# Allegro board Mures_Georgiana.brd
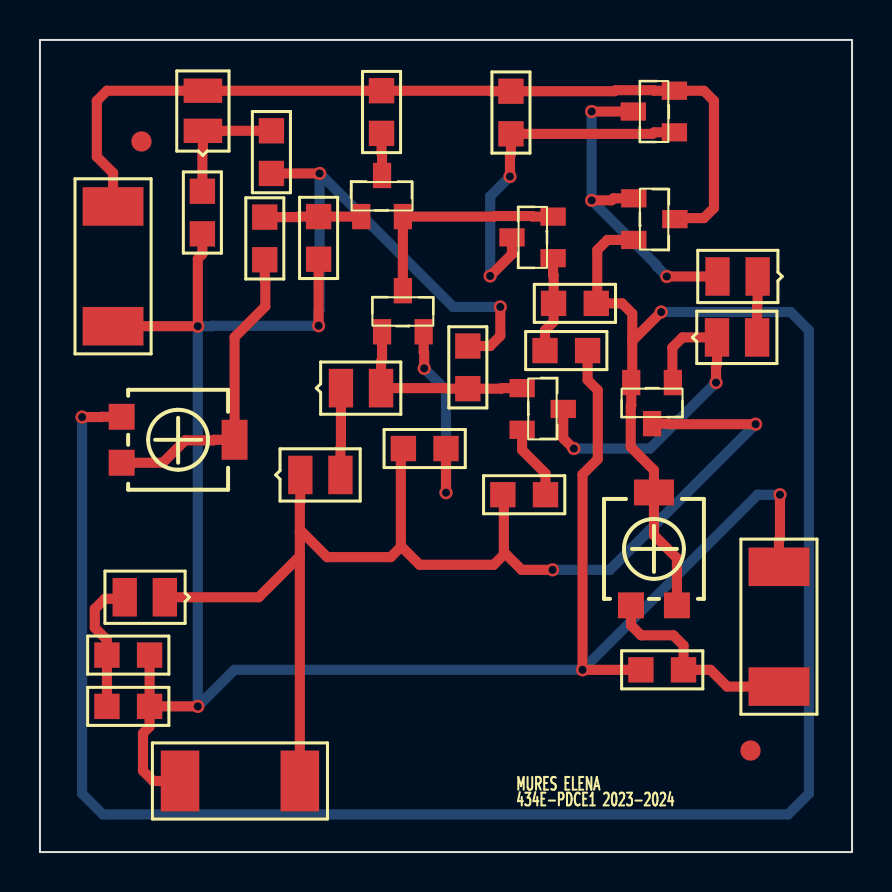
[diagram p0: board, top side]
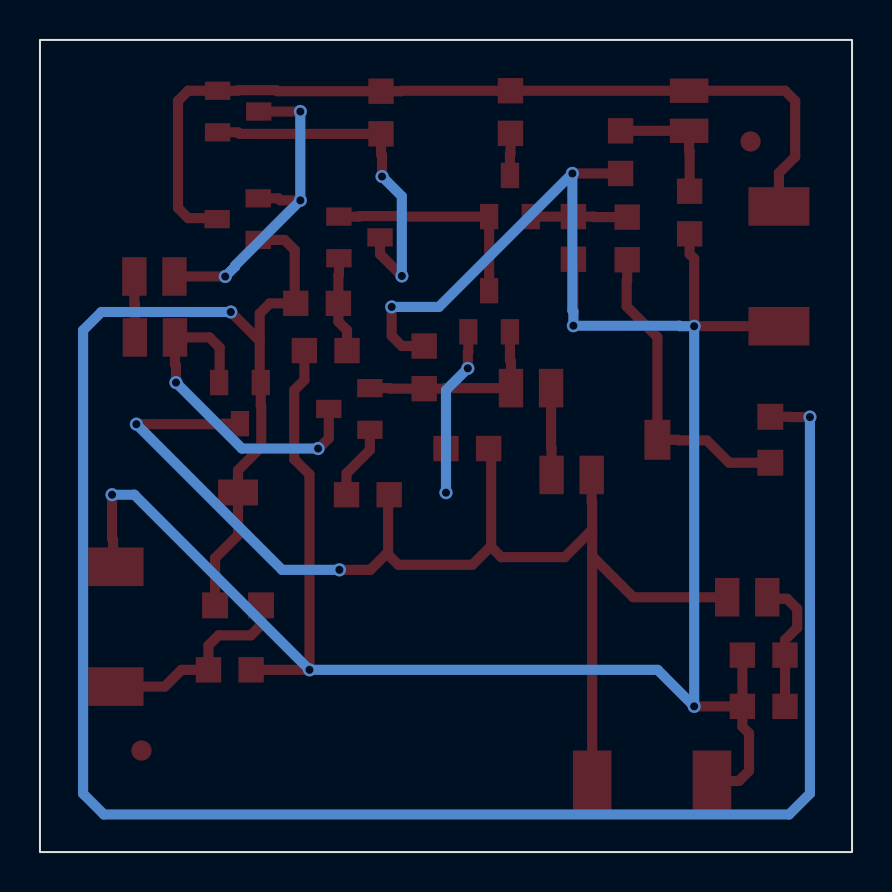
[diagram p1: board, bottom side, seen from below]

Outline 40.64 x 40.64 mm; copper layers: TOP, BOTTOM. Coordinates in mm from the lower left corner of the outline.
Outline path: rectangle 0,0 40.64,40.64

## Design rules (mm)
nets with their own width: min track width 0.406; nets N52612 N52626 N52640 N52746 N52752 N52812 N52842 N52912 N52990 N53016 N53140 N53266 N53280 N53508 N53516 N53588 N530321
nets with their own width: min track width 0.508; nets GND VCC VEE

## Placement (name value [footprint] x y rotation side)
C1  22n  [SMC0805]  13.94 29.67 90 top
D3  LED  [SMD0805]  8.15 36.09 90 top
D4  LED  [SMD0805]  6.25 12.75 180 top
J1  CON2  [SMR2512]  3.66 26.31 90 top
J2  CON2  [SMR2512]  13 3.56 180 top
J3  CON2  [SMR2512]  36.98 8.28 90 top
NOREF  -  [unnamed]  5.08 35.56 0 top
NOREF#2  -  [#2]  0 40.64 0 top
NOREF#3  -  [#2]  0 0 90 top
NOREF#4  -  [unnamed]  35.56 5.08 0 top
P2  10k  [TS53YL]  4.09 19.48 180 top
P10  500k  [TS53YL]  31.88 12.34 270 top
Q1  QBC846B  [TO236AB]  25.68 29.72 0 top
Q2  QBC846B  [TO236AB]  16.08 31.8 270 top
Q3  QBC846B  [TO236AB]  17.12 26.04 270 top
Q4  QBC846B  [TO236AB]  24.13 23.22 180 top
Q5  QBC846B  [TO236AB]  29.72 32.72 180 top
Q6  QBC856B  [TO236AB]  31.75 36.02 0 top
Q7  QBC856B  [TO236AB]  31.67 23.5 90 top
R1  330  [SMR0805]  11.25 31.78 270 top
R3  680  [SMR0805]  17.09 35.97 90 top
R4  680  [SMR0805]  23.57 35.94 90 top
R5  10k  [SMR0805]  27.84 27.46 180 top
R6  10k  [SMR0805]  27.41 25.1 180 top
R7  330  [SMR0805]  23.16 17.88 0 top
R8  330  [SMR0805]  18.19 20.19 0 top
R9  6.8k  [SMR0805]  21.41 23.19 90 top
R12  1k  [SMR0805]  11.58 33.96 90 top
R13  1k  [SMR0805]  8.13 30.94 90 top
R14  1k  [SMR0805]  3.35 7.29 0 top
R15  1k  [SMR0805]  3.35 9.86 0 top
R16  15k  [SMR0805]  30.07 9.12 0 top
U1  1N4148  [SMD0805]  35.92 28.8 180 top
U2  1N4148  [SMD0805]  33.88 25.76 0 top
U3  1N4148  [SMD0805]  15.06 23.22 0 top
U4  1N4148  [SMD0805]  13.03 18.87 0 top

## Library data of the parts
C1 = C
D3 D4 = LED_0
J1-J3 = CON2
P2 P10 = POT
Q1-Q5 = QBC846B_0
Q6 Q7 = QBC856B_0
R1 R3-R9 R12-R16 = R
U1-U4 = 1N4148_0

## Footprints (pads in the part's own frame, mm; a bottom-side part is the same pattern mirrored in y, then rotated)
SMC0805
  rect 1.27x1.27 smd: 1(0,0) 2(2.134,0)
SMD0805
  rect 1.219x1.93 smd: A(2.007,0) C(0,0)
SMR0805
  rect 1.27x1.27 smd: 1(0,0) 2(2.134,0)
SMR2512
  rect 1.93x3.048 smd: 1(0,0) 2(5.994,0)
TO236AB
  rect 1.27x0.914 smd: 1(0,0) 2(0,2.083) 3(-2.057,1.041)
TS53YL
  rect 1.3x1.3 smd: 1(0,0) 3(0,-2.3)
  rect 1.3x2 smd: 2(-5.65,-1.15)
unnamed
  round 1.016 smd: (0,0)

## Nets
GND: C1.1 J1.1 J2.2 J3.2 R6.1 R9.2 R12.1 R13.1 R14.2 R15.2 R16.1
VCC: D3.A J1.2 Q5.3 Q6.2(E) R3.2 R4.2
VEE: D4.C(CATHODE) J2.1 Q7.3 R7.1 R8.1 U4.C(2)
N52612: C1.2 Q2.1 R1.1
N52626: P2.1 P2.2(T) R1.2
N52640: P2.3 P10.1 P10.2(T) Q5.2(E) Q7.2(E) R5.1
N52746: Q2.3 R3.1
N52752: Q1.3 Q6.1 R4.1
N52812: Q5.1 Q6.3 U1.A
N52842: D3.C(CATHODE) R12.2 R13.2
N52912: Q1.1 R5.2 R6.2
N52990: J3.1 P10.3 R16.2
N53016: Q1.2(E) Q2.2(E) Q3.3
N53140: Q3.1 Q4.1 R9.1 U3.A
N53266: Q3.2(E) R8.2
N53280: Q4.3 Q7.1 U2.C(2)
N53508: D4.A R14.1 R15.1
N53516: Q4.2(E) R7.2
N53588: U3.C(2) U4.A
N530321: U1.C(2) U2.A

## Via types
v1: diameter 0.66, hole 0.406, TOP to BOTTOM, 20 vias

## Routing (per net, layer and track width the routed paths; a pad name or vN(x,y) marks a point on that pad's centre or on a via; arc(x,y) is an arc through that point)
GND: length 129.5
  TOP w0.508: R14.2 R15.2 ; R14.2 v1(7.9,7.29) ; R14.2 5.49,6.27 5.16,5.94 5.16,4.06 5.66,3.56 J2.2 ; R16.1 v1(27.15,9.12) 27.15,18.9 27.91,19.66 27.91,23.11 27.41,23.62 R6.1 ; v1(23.04,27.28) 23.04,25.83 22.53,25.32 R9.2 ; v1(37.03,17.88) 37.03,15.67 36.98,15.62 J3.2 ; R13.1 8.13,29.92 7.9,29.69 v1(7.9,26.31) J1.1 ; C1.1 v1(13.94,26.34) ; R12.1 v1(14,33.96)
  BOTTOM w0.508: v1(37.03,17.88) 35.92,17.88 v1(27.15,9.12) 9.73,9.12 v1(7.9,7.29) v1(7.9,26.31) 8.61,26.31 8.64,26.34 v1(13.94,26.34) 13.94,27.05 14,27.1 v1(14,33.96) 20.68,27.28 v1(23.04,27.28)
VCC: length 44.5
  TOP w0.508: Q5.3 31.83,31.72 33.22,31.72 33.73,32.23 33.73,37.59 33.22,38.1 Q6.2 30.73,38.1 30.71,38.13 28.8,38.13 28.75,38.07 R4.2 22.56,38.07 22.53,38.1 R3.2 D3.A 3.35,38.1 2.84,37.59 2.84,34.8 3.66,33.99 J1.2
VEE: length 63.6
  TOP w0.508: 18.06,15.27 18.11,15.27 19,14.38 22.71,14.38 23.22,14.88 ; 18.06,15.27 18.06,20.07 R8.1 ; 18.06,15.27 17.55,14.76 14.38,14.76 13.08,16.05 13,16.05 ; v1(25.65,14.12) 24.1,14.12 23.34,14.88 23.22,14.88 ; 13,16.05 13,17.5 13.03,17.53 U4.C ; 13,16.05 13,14.81 ; 23.22,14.88 23.22,17.83 R7.1 ; v1(35.81,21.41) 31.5,21.41 31.47,21.44 Q7.3 ; 13,14.81 J2.1 ; 13,14.81 10.95,12.75 D4.C
  BOTTOM w0.508: v1(35.81,21.41) 28.52,14.12 v1(25.65,14.12)
N52612: length 4.8
  TOP w0.508: R1.1 12.9,31.78 12.93,31.8 C1.2 Q2.1
N52626: length 15.8
  TOP w0.508: R1.2 11.25,28.63 11.28,28.6 11.28,27.3 9.74,25.77 P2.2 8.71,20.63 8.68,20.6 7.26,20.6 6.15,19.48 P2.1
N52640: length 113.4
  TOP w0.508: 29.64,25.58 v1(31.09,27.03) ; 29.64,25.58 29.64,23.55 Q7.2 29.59,22.35 29.57,22.33 29.57,20.27 30.73,19.11 P10.2 30.73,15.86 31.88,14.71 P10.1 ; 29.64,25.58 29.64,26.95 29.13,27.46 R5.1 27.89,27.51 27.89,30.12 28.4,30.63 Q5.2 ; P2.3 3.06,21.78 3.04,21.77 v1(2.11,21.77)
  BOTTOM w0.508: v1(31.09,27.03) 37.57,27.03 38.48,26.11 38.48,2.92 37.44,1.88 3.15,1.88 2.11,2.92 v1(2.11,21.77)
N52746: length 2.1
  TOP w0.508: R3.1 17.09,34.95 17.12,34.92 Q2.3
N52752: length 18.1
  TOP w0.508: v1(22.53,28.83) 23.62,29.92 Q1.3 ; Q6.1 30.73,36.02 30.66,35.94 R4.1 23.57,34.92 23.52,34.87 v1(23.52,33.81)
  BOTTOM w0.508: v1(23.52,33.81) 22.53,32.82 v1(22.53,28.83)
N52812: length 16.6
  TOP w0.508: U1.A v1(31.37,28.8) ; Q5.1 28.7,32.72 28.6,32.61 v1(27.61,32.61) ; Q6.3 v1(27.61,37.06)
  BOTTOM w0.508: v1(27.61,37.06) v1(27.61,32.61) 30.87,29.36 30.87,29.31 v1(31.37,28.8)
N52842: length 6.5
  TOP w0.508: R13.2 8.13,35.08 8.15,35.1 D3.C R12.2
N52912: length 4.8
  TOP w0.508: R6.2 25.27,26.11 25.7,26.54 R5.2 25.7,28.85 25.68,28.88 Q1.1
N52990: length 10.4
  TOP w0.508: P10.3 29.58,11.35 30.09,10.85 31.7,10.85 32.21,10.34 R16.2 33.55,9.12 34.39,8.28 J3.1
N53016: length 11.2
  TOP w0.508: Q3.3 Q2.2 22.71,31.8 22.73,31.83 24.64,31.83 24.66,31.8 Q1.2
N53140: length 9.9
  TOP w0.508: Q4.1 23.11,23.22 23.09,23.19 R9.1 20.4,23.19 20.37,23.22 U3.A 17.07,24.56 17.12,24.61 Q3.1
N53266: length 10.7
  TOP w0.508: v1(19.23,24.21) 19.23,24.99 19.2,25.02 Q3.2 ; R8.2 v1(20.32,17.98)
  BOTTOM w0.508: v1(20.32,17.98) 20.32,23.11 v1(19.23,24.21)
N53280: length 17.2
  TOP w0.508: v1(33.83,23.5) 33.83,24.36 33.88,24.41 U2.C 32.16,25.76 31.65,25.25 31.65,23.52 Q7.1 ; v1(26.72,20.19) 26.7,20.19 26.19,20.7 Q4.3
  BOTTOM w0.508: v1(33.83,23.5) 30.53,20.19 v1(26.72,20.19)
N53508: length 6.9
  TOP w0.508: R14.1 R15.1 3.35,10.62 2.74,11.23 2.74,12.17 3.25,12.67 4.17,12.67 D4.A
N53516: length 3.7
  TOP w0.508: R7.2 25.3,18.95 24.13,20.12 Q4.2
N53588: length 4.4
  TOP w0.508: U4.A 15.04,20.22 15.06,20.24 U3.C
N530321: length 3.1
  TOP w0.508: U2.A 35.89,27.43 35.92,27.46 U1.C

## Text on the board
Ref Des/Silkscreen Top: MURES ELENA | 434E-PDCE1 2023-2024
XSECTION_CHART: *  SURFACE - AIR 0 MIL | L1 TOP CONDUCTOR - COPPER 1.4 MIL | *  DIELECTRIC - FR-4 61.2 MIL | L2 BOTTOM CONDUCTOR - COPPER 1.4 MIL | DESIGN CROSS SECTION CHART | ___________________________ | TOTAL THICKNESS 64 MIL | 1-2
DIMENSION: FIGURE | FINISHED_SIZE | 16.0 | DRILL CHART: TOP to BOTTOM | ALL UNITS ARE IN MILS | PLATED | QTY | 20
